# Altium PCB Gimbal.PcbDoc
Units mm, origin at the board's own origin, x right, y up, seen from the top; angles counter-clockwise.
Board outline 50 x 31.8 mm, 2 copper layers (Top Layer, Bottom Layer); 74 components, 94 nets, 328 pads, 49 vias.
Unrouted connection lines stored in the file: 148.
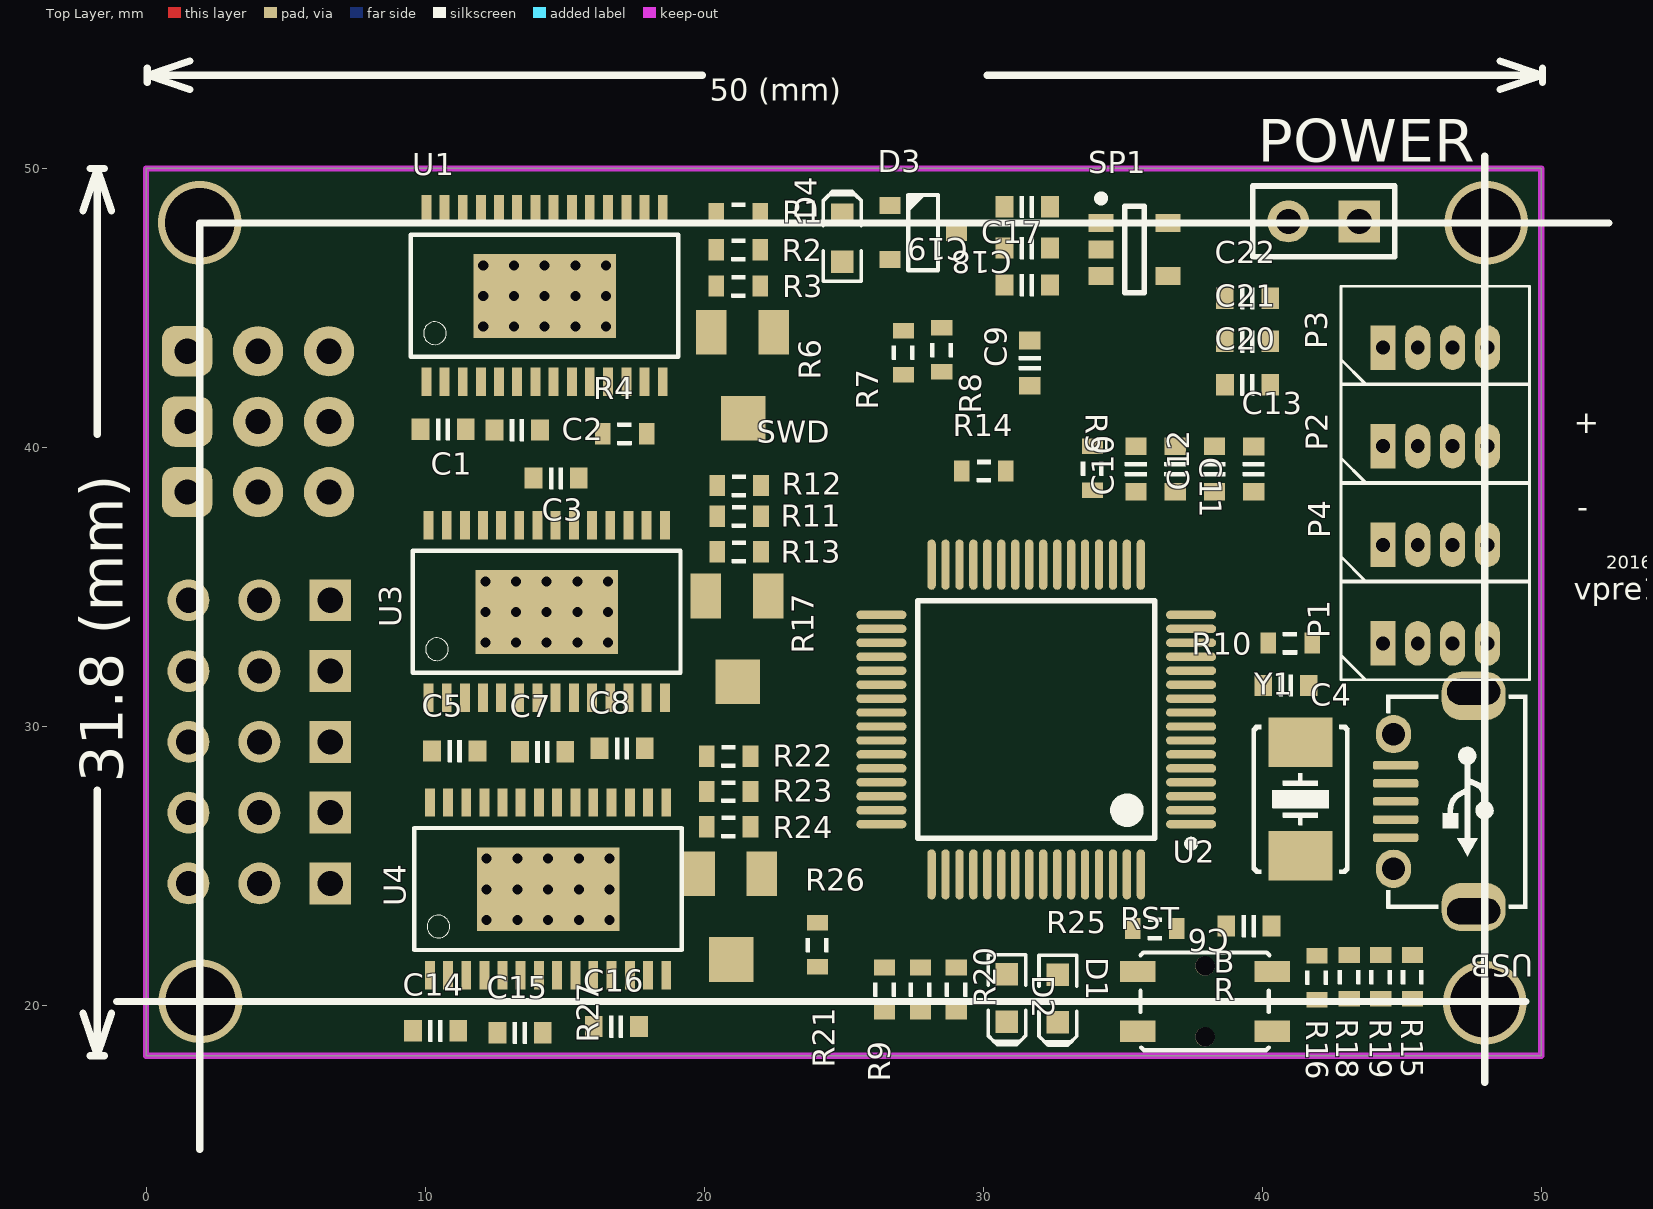
[diagram p0: Top Layer view]
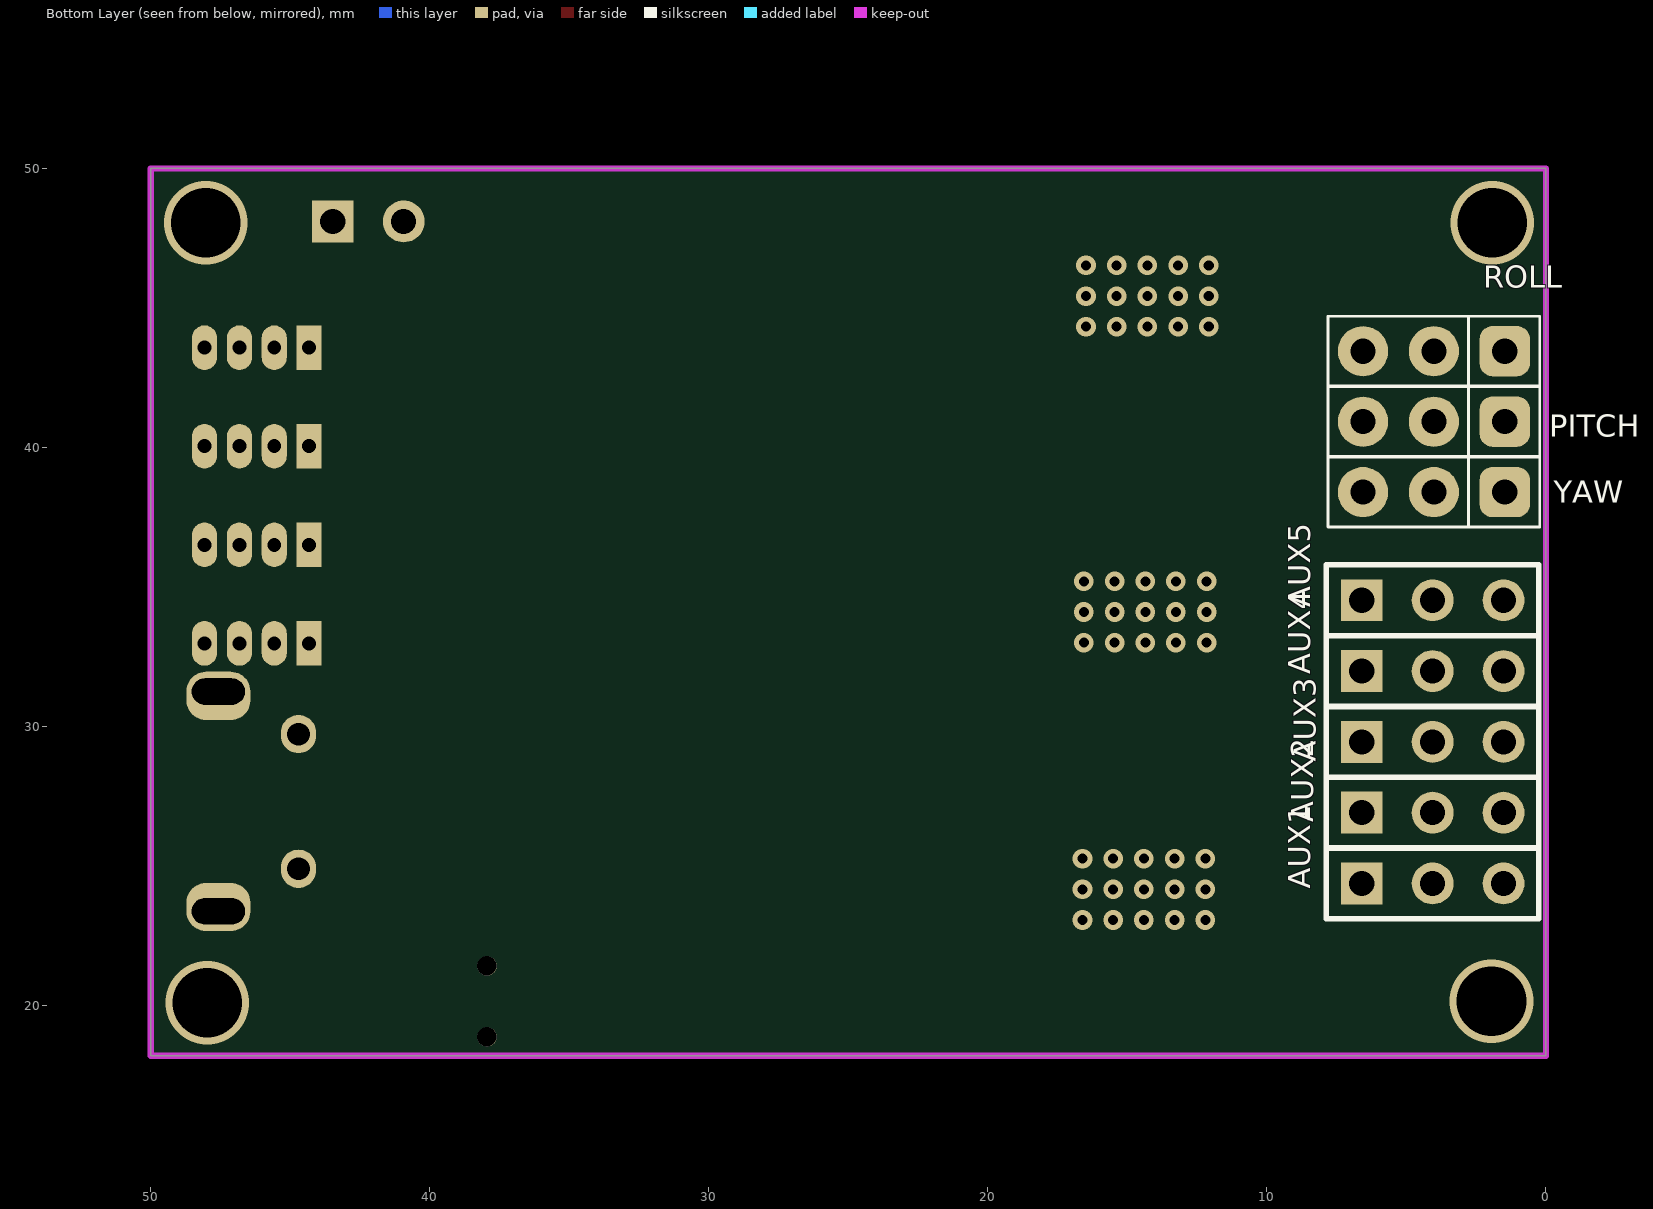
[diagram p1: Bottom Layer view, seen from below]

## Layer stack, top to bottom
Top Solder: solder mask 0.0102, Solder Resist, Dk 3.5
Top Layer: signal copper 0.0356
Dielectric1: dielectric 0.32, FR-4, Dk 4.8
Bottom Layer: signal copper 0.0356
Bottom Solder: solder mask 0.0102, Solder Resist, Dk 3.5

## Board outline
0,18.2 0,50 50,50 50,18.2

## Design rules (kind name [scope] priority, off if disabled: settings)
Clearance Clearance_1 [(OnLayer('Keep-Out Layer')) vs inPolygon] p1: gap=0.381
Clearance [All] p2: gap=0.152
ComponentClearance [All] p1 off: gap=0.254 collisioncheckmode=3 verticalgap=0.254 showdistances=FALSE
Height [All] p1 off: minheight=0 maxheight=25.4 prefheight=12.7
HoleSize [All] p1: absolutevalues=TRUE maxlimit=2.54 minlimit=0.33 maxpercent=80.000 minpercent=20.000
HoleToHoleClearance [All] p1: gap=0.254 allowstackedmicrovias=FALSE
MinimumAnnularRing [All] p1: minimumring=0.178
MinimumSolderMaskSliver [All] p1 off: minsoldermaskwidth=0.254
NetAntennae [All] p1 off: netantennaetolerance=0
PolygonConnect [IsPoly vs IsVia] p1: connectstyle=Direct reliefconductorwidth=0.254 reliefentries=4 polygonreliefangle="90 Angle" airgapwidth=0.254
PolygonConnect PolygonConnect_1 [All] p2: connectstyle=Relief reliefconductorwidth=0.3 reliefentries=4 polygonreliefangle="90 Angle" airgapwidth=0.254
RoutingVias [All] p1: holewidth=0.4 width=0.8 viastyle="Through Hole" minholewidth=0.4 minwidth=0.8 maxholewidth=0.4 maxwidth=0.8
SilkToSilkClearance [All] p1 off: silktosilkclearance=0.254
SilkToSolderMaskClearance SilkscreenOverComponentPads [IsPad] p1 off: minsilkscreentomaskgap=0.254 clearancetoexposedcopper=TRUE
SolderMaskExpansion [All] p1: expansion=0.05
Width [All] p1: maxlimit=2 minlimit=0.152 preferedwidth=0.22
22 further rules are at their usual default settings.

## Components (designator, comment, footprint, x,y, rotation, side; value= is the part's Value field where it differs from the comment)
AUX1 "" HDR1X3 6.6,24.375 r180 bottom
AUX2 "" HDR1X3 6.6,26.913 r180 bottom
AUX3 "" HDR1X3 6.6,29.45 r180 bottom
AUX4 "" HDR1X3 6.6,31.988 r180 bottom
AUX5 "" HDR1X3 6.6,34.525 r180 bottom
C1 "Cap" c-0603 10.65,40.65 r0 top
C2 "Cap" C-0603 13.3,40.625 r180 top
C3 "Cap" c-0603 14.7,38.9 r0 top
C4 "22pF" C-0603 40.85,31.475 r180 top
C5 "Cap" c-0603 11.064,29.119 r0 top
C6 "22pF" C-0603 39.525,22.85 r0 top
C7 "Cap" c-0603 14.214,29.094 r0 top
C8 "Cap" c-0603 17.064,29.219 r0 top
C9 "CAP" C-0603 31.675,43.025 r90 top
C10 "CAP" C-0603 35.475,39.225 r270 top
C11 "CAP" C-0603 36.883,39.225 r270 top
C12 "CAP" C-0603 38.292,39.225 r270 top
C13 "Cap" c-0603 39.7,39.225 r90 top
C14 "Cap" c-0603 10.375,19.1 r180 top
C15 "Cap" c-0603 13.4,19.025 r180 top
C16 "Cap" c-0603 16.85,19.25 r180 top
C17 "Cap" C-0603 31.575,48.625 r180 top
C18 "Cap" C-0603 31.575,45.825 r180 top
C19 "Cap" c-0603 31.575,47.15 r180 top
C20 "Cap" c-0603 39.475,42.25 r180 top
C21 "Cap" c-0603 39.475,43.8 r0 top
C22 "Cap" c-0603 39.475,45.35 r0 top
D1 "APT1608SGC" LED-0603-GREEN 32.675,20.25 r270 top
D2 "APT1608SGC" LED-0603-GREEN 30.85,20.275 r270 top
D3 "PMEG4005CT" SOT23-3 27.85,47.7 r0 top
D4 "APT1608QBC/D" LED-0603-BLUE 24.95,47.5 r90 top
P1 "I2C" H53047-04 44.323,32.979 r0 top
P2 "UART1" H53047-04 44.323,40.045 r0 top
P3 "UART4" H53047-04 44.323,43.578 r0 top
P4 "SWD" H53047-04 44.323,36.512 r0 top
PITCH "Header 3" IDC1-3M 1.475,40.925 r180 bottom
POWER "Header 2" HDR1X2 43.475,48.1 r180 top
R1 "RES" R-0603 21.225,48.375 r180 top
R2 "RES" R-0603 21.225,47.075 r180 top
R3 "RES" R-0603 21.225,45.775 r180 top
R4 "TBD" R-0603 17.15,40.5 r0 top
R5 "10k" R-0603 33.925,39.25 r270 top
R6 "Res_VR_3" RES_VR_3313J 21.375,42.55 r180 top
R7 "100" R-0603 27.15,43.4 r270 top
R8 "100" R-0603 28.525,43.5 r270 top
R9 "10k" R-0603 26.475,20.575 r270 top
R10 "10k" R-0603 41,33 r0 top
R11 "RES" R-0603 21.25,37.525 r180 top
R12 "RES" R-0603 21.25,38.625 r180 top
R13 "RES" R-0603 21.25,36.25 r180 top
R14 "TBD" R-0603 30.025,39.15 r180 top
R15 "1k5" R-0603 45.375,21.025 r90 top
R16 "22" R-0603 41.95,21 r90 top
R17 "Res_VR_3" RES_VR_3313J 21.175,33.1 r180 top
R18 "22" R-0603 43.125,21.025 r270 top
R19 "220" R-0603 44.259,21.025 r270 top
R20 "330" R-0603 29.025,20.575 r90 top
R21 "330" R-0603 27.759,20.575 r270 top
R22 "RES" R-0603 20.875,28.925 r180 top
R23 "RES" R-0603 20.875,27.662 r180 top
R24 "RES" R-0603 20.875,26.4 r180 top
R25 "Res" r-0603 36.15,22.75 r180 top
R26 "TBD" R-0603 24.05,22.175 r90 top
R27 "Res_VR_3" RES_VR_3313J 20.95,23.15 r180 top
ROLL "Header 3" IDC1-3M 1.475,43.45 r180 bottom
RST "BT_TACT_3.5*5_90" BUTTONTACT_3.5*3.55_90 37.95,20.15 r180 top
SP1 "SP6205" SOT23-5 35.425,47.1 r0 top
U1 "DRV8313" TSSOP-28P-C 14.275,45.438 r0 top
U2 "STM32F103RCT6" LQFP64_N 31.9,30.25 r180 top
U3 "DRV8313" TSSOP-28P-C 14.35,34.114 r0 top
U4 "DRV8313" TSSOP-28P-C 14.4,24.176 r0 top
USB "USB_Micro" USB_Micro-AB 47.32,27.315 r270 top
Y1 "XTAL" XT_5032_2 41.375,27.4 r270 top
YAW "Header 3" IDC1-3M 1.475,38.4 r180 bottom

## Footprints (in the part's own frame and the unit in brackets; to place one, negate y for a bottom-side part, rotate by r counter-clockwise, add the part's x,y. Pads: shape width x height; smd on the part's side, far side on the other; paste and mask are expansions set on the pad)
BUTTONTACT_3.5*3.55_90 [mil]
  round 27.56 hole 27.56 mask+0: 0(-0.01,-50) 0(0,50)
  rect 50x30 smd: 1(-95,42) 2(-95,-42) 3(95,42) 4(95,-42)
  silkscreen extent -91,-69 91,69, body extent -90,-55 91,85, height 56
c-0603 [mil]
  rect 25x30 smd: 1(-32.13,0.08) 2(31.87,0.08)
  silkscreen extent -9,-15 10,15, body extent -31,-16 32,16, height 31
C-0603 [mil]
  rect 25x30 smd: 1(-32.13,0.08) 2(31.87,0.08)
  silkscreen extent -9,-15 10,15, body extent -31,-16 32,16, height 31
H53047-04 [mm]
  rect 0.9x1.6 hole 0.5: 1(0,0)
  oval 0.9x1.6 hole 0.5: 2(1.25,0) 3(2.5,0) 4(3.75,0)
  silkscreen extent -1.5,-1.3 5.25,2.2, body extent -1.5,-1.3 5.25,2.2, height 4.17
HDR1X2 [mm] "Connector; Header; 2 Position"
  rect 1.5x1.5 hole 0.9: 1(0,0)
  round 1.5 hole 0.9: 2(2.54,0)
  silkscreen extent -1.27,-1.27 3.81,1.27
HDR1X3 [mm] "Connector; Header; 3 Position"
  rect 1.5x1.5 hole 0.9: 1(0,0)
  round 1.5 hole 0.9: 2(2.54,0) 3(5.08,0)
  silkscreen extent -1.27,-1.27 6.35,1.27
IDC1-3M [mm]
  rrect50% 1.8x1.8 hole 0.9: 1(0,0)
  round 1.8 hole 0.9: 2(-2.54,0) 3(-5.08,0)
  silkscreen extent -6.33,-1.25 1.25,1.25
LED-0603-BLUE [mm]
  round 0.254 on Mech14: 0(0,0)
  rect 0.8x0.8 smd: A(-0.85,0) K(0.85,0)
  Top Layer pour cut-out: -0.5,0.5 0.5,0.5 0.5,-0.5 -0.5,-0.5
  silkscreen extent -1.55,-0.67 1.68,0.67, body extent -0.8,-0.4 0.8,0.4, height 0.75
LED-0603-GREEN [mm]
  round 0.254 on Mech14: 0(0,0)
  rect 0.8x0.8 smd: A(-0.85,0) K(0.85,0)
  Top Layer pour cut-out: -0.5,0.5 0.5,0.5 0.5,-0.5 -0.5,-0.5
  silkscreen extent -1.55,-0.67 1.68,0.67, body extent -0.8,-0.4 0.8,0.4, height 0.75
LQFP64_N [mm] "Thin QFP, 64-Leads, Body 10x10mm, Pitch 0.5mm, IPC Medium Density"
  oval 1.8x0.3 smd: 1(-5.55,3.75) 2(-5.55,3.25) 3(-5.55,2.75) 4(-5.55,2.25) 5(-5.55,1.75) 6(-5.55,1.25) 7(-5.55,0.75) 8(-5.55,0.25) 9(-5.55,-0.25) 10(-5.55,-0.75) 11(-5.55,-1.25) 12(-5.55,-1.75) 13(-5.55,-2.25) 14(-5.55,-2.75) 15(-5.55,-3.25) 16(-5.55,-3.75) 33(5.55,-3.75) 34(5.55,-3.25) 35(5.55,-2.75) 36(5.55,-2.25) 37(5.55,-1.75) 38(5.55,-1.25) 39(5.55,-0.75) 40(5.55,-0.25) 41(5.55,0.25) 42(5.55,0.75) 43(5.55,1.25) 44(5.55,1.75) 45(5.55,2.25) 46(5.55,2.75) 47(5.55,3.25) 48(5.55,3.75)
  oval 0.3x1.8 smd: 17(-3.75,-5.55) 18(-3.25,-5.55) 19(-2.75,-5.55) 20(-2.25,-5.55) 21(-1.75,-5.55) 22(-1.25,-5.55) 23(-0.75,-5.55) 24(-0.25,-5.55) 25(0.25,-5.55) 26(0.75,-5.55) 27(1.25,-5.55) 28(1.75,-5.55) 29(2.25,-5.55) 30(2.75,-5.55) 31(3.25,-5.55) 32(3.75,-5.55) 49(3.75,5.55) 50(3.25,5.55) 51(2.75,5.55) 52(2.25,5.55) 53(1.75,5.55) 54(1.25,5.55) 55(0.75,5.55) 56(0.25,5.55) 57(-0.25,5.55) 58(-0.75,5.55) 59(-1.25,5.55) 60(-1.75,5.55) 61(-2.25,5.55) 62(-2.75,5.55) 63(-3.25,5.55) 64(-3.75,5.55)
  silkscreen extent -5.68,-4.25 4.25,4.57, body extent -6,-6 6,6, height 1.5
R-0603 [mil]
  rect 22x30 smd: 1(-30.99,-0.35) 2(31.01,-0.35)
  silkscreen extent -9,-16 10,15, body extent -31,-16 32,15, height 18
r-0603 [mil]
  rect 22x30 smd: 1(-30.99,-0.35) 2(31.01,-0.35)
  silkscreen extent -9,-16 10,15, body extent -31,-16 32,15, height 18
RES_VR_3313J [mm] "CA6SMD"
  rect 1.1x1.6 smd: 1(-1.118,-1.575) 2(1.118,-1.575)
  rect 1.6x1.6 smd: 3(-0.025,1.499)
  body extent -1.6,-1.79 1.6,1.71, height 2.45
SOT23-3 [mil]
  rect 30x24 smd: 1(-47,38) 2(-47,-38) 3(47,0)
  silkscreen extent -21,-53 21,53, body extent -55,-57 55,57, height 51
SOT23-5 [mm]
  rect 0.9x0.65 smd: 1(-1.2,0.95) 2(-1.2,0) 3(-1.2,-0.95) 4(1.2,-0.95) 5(1.2,0.95)
  silkscreen extent -1.32,-1.55 0.35,1.95, body extent -1.4,-1.45 1.4,1.45, height 1.45
TSSOP-28P-C [mil]
  rect 14x40 smd: 1(-166.34,-121.56) 2(-140.75,-121.56) 3(-115.16,-121.56) 4(-89.57,-121.56) 5(-63.98,-121.56) 6(-38.39,-121.56) 7(-12.8,-121.56) 8(13,-121.56) 9(39,-121.56) 10(64,-121.56) 11(90,-121.56) 12(116,-121.56) 13(141,-121.56) 14(167,-121.56) 15(167,122) 16(141,122) 17(116,122) 18(90,122) 19(64,122) 20(39,122) 21(13,122) 22(-12.8,122) 23(-38.39,122) 24(-63.98,122) 25(-89.57,122) 26(-115.16,122) 27(-140.75,122) 28(-166.34,122)
  rect 200.79x118.11 smd mask-236.22: 29(0.31,-0.39)
  silkscreen extent -189,-86 189,86, body extent -192,-129 194,131, height 41
USB_Micro-AB [mil]
  rrect80% 68x90 hole 37 slot 75 at 90 deg copper offset 6,0 mask+0: 0(-155,10)
  oval 54x50 hole 32 mask+0: 0(-95,-103) 0(95,-103)
  rrect80% 68x90 hole 37 slot 75 at 90 deg copper offset -6,0 mask+0: 0(155,10)
  rrect50% 12x64 smd: 1(51.18,-100) 2(25.59,-100) 3(0,-100) 4(-25.59,-100) 5(-51.18,-100)
  silkscreen extent -151,-113 151,86, body extent -161,-109 161,104, height 108
XT_5032_2 [mil]
  rect 70x90 smd: 1(-80,0) 2(80,0)
  silkscreen extent -105,-69 105,69, body extent -98,-63 98,63, height 39

## Part data
AUX1 AUX2 AUX3 AUX4 AUX5: library part "Header 3", "Header, 3-Pin"
C1 C2 C3 C4 C5 C6 C7 C8 C9 C10 C11 C12 C13 C14 C15 C16 C17 C18 C19 C20 C21 C22: library part CAP0805, "Capacitor"
D1 D2 D4: library part LED
D3: "Dual Diode Command Cathode 500ma"
P1 P2 P3 P4: library part "Header 4", "0530470410"
PITCH ROLL YAW: "Header, 3-Pin"
POWER: "Header, 2-Pin"
R1 R2 R3 R4 R5 R7 R8 R9 R10 R11 R12 R13 R14 R15 R16 R18 R20 R21 R22 R23 R24 R26: library part "RES 0603 330R", "Resistor"
R6 R17 R25 R27: "Resistor"
R19: library part Res, "Resistor"
RST: "Switch"
SP1: "Power"
U2: library part STM32F103RBT6, "STM32 ARM-based 32-bit MCU with 128 Kbytes Flash, 64-pin LQFP, Industrial Temperature"
USB: "USB"

## Via types
v1: diameter 0.7, hole 0.36, Top Layer to Bottom Layer, 45 vias
v2: diameter 3, hole 2.5, Top Layer to Bottom Layer, 4 vias

## Nets (pads, with @x,y where several pads share a name; then routed paths per layer and width w, separated by ;. In a path a pad name is that pad's centre, name@x,y a point inside that pad or via, vN(x,y) a via of type N, cw(c..) or ccw(c..) an arc to the next point about the centre after c; other vN are vias at no path point)
+3.3V: P2.4
AUX1: AUX1.1 U2.11 U2.53
AUX2: AUX2.1 U2.10 U2.54
AUX3: AUX3.1 U2.55
AUX4: AUX4.1 U2.56
AUX5: AUX5.1 U2.57
BOOT0: R9.1 U2.60
BOOT1: R5.2 U2.28
DM: R16.1 U2.44
DP: R15.2 R18.1 U2.45
GND: AUX1.3 AUX2.3 AUX3.3 AUX4.3 AUX5.3 C3.2 C4.2 C6.2 C8.2 C9.2 C10.2 C11.2 C12.2 C13.2 C16.2 C17.2 C18.2 C19.2 C20.2 C21.2 C22.2 D1.K D2.K D4.K P1.3 P2.1 P3.1 P4.1 POWER.2 R1.2 R2.2 R3.2 R4.2 R5.1 R6.1 R9.2 R11.2 R12.2 R13.2 R14.2 R17.1 R22.2 R23.2 R24.2 R26.2 R27.1 RST.2 RST.4 SP1.2 U1.14 U2.12 U2.18 U2.31 U2.47 U2.63 U3.14 U4.14 USB.5
  other v2: 1.95,20.15
LED1: R21.1 U2.33
LED2: R20.1 U2.17
NetC1_1: C1.1 U1.1
NetC1_2: C1.2 U1.2
NetC2_1: C2.1 U1.3
NetC4_1: C4.1 U2.5 Y1.2
NetC5_1: C5.1 U3.1
NetC5_2: C5.2 U3.2
NetC6_1: C6.1 U2.6 Y1.1
NetC7_1: C7.1 U3.3
NetC14_1: C14.1 U4.1
NetC14_2: C14.2 U4.2
NetC15_1: C15.1 U4.3
NetC17_1: C17.1 D3.3 SP1.1 SP1.3
NetC19_1: C19.1 SP1.4
NetD1_A: D1.A R20.2
NetD2_A: D2.A R21.2
NetD4_A: D4.A R25.1
NetP2_2: P2.2 R8.2
NetP2_3: P2.3 R7.2
NetR4_1: R4.1 U1.6 U1.7 U1.10 U1.12
NetR6_2: R6.2 U1.15
NetR6_3: R6.3 U1.13
NetR14_1: R14.1 U3.6 U3.7 U3.10 U3.12
NetR16_2: R16.2 USB.2
NetR17_2: R17.2 U3.15
NetR17_3: R17.3 U3.13
NetR18_2: R18.2 R19.2 USB.3
NetR26_1: R26.1 U4.6 U4.7 U4.10 U4.12
NetR27_2: R27.2 U4.15
NetR27_3: R27.3 U4.13
NetU1_20: U1.20 U1.28 U1.29
  other v1: 12.083,44.328 13.183,44.328 14.283,44.328 15.383,44.328 16.483,44.328 12.083,45.428 13.183,45.428 14.283,45.428 15.383,45.428 16.483,45.428 12.083,46.528 13.183,46.528 14.283,46.528 15.383,46.528 16.483,46.528
NetU3_20: U3.20 U3.28 U3.29
  other v1: 12.158,33.004 13.258,33.004 14.358,33.004 15.458,33.004 16.558,33.004 12.158,34.104 13.258,34.104 14.358,34.104 15.458,34.104 16.558,34.104 12.158,35.204 13.258,35.204 14.358,35.204 15.458,35.204 16.558,35.204
NetU4_20: U4.20 U4.28 U4.29
  other v1: 12.208,23.066 13.308,23.066 14.408,23.066 15.508,23.066 16.608,23.066 12.208,24.166 13.308,24.166 14.408,24.166 15.508,24.166 16.608,24.166 12.208,25.266 13.308,25.266 14.408,25.266 15.508,25.266 16.608,25.266
NRST: C9.1 P4.4 R10.1 RST.1 RST.3 U2.7
PA4: U2.20
PA5: U2.21
PA6: U2.22
PB9: U2.62
PC0: U2.8
PC1: U2.9
PC4: U2.24
PC5: U2.25
PITCH_EN1: R3.1 U1.26 U2.23
PITCH_EN2: R2.1 U1.24 U2.26
PITCH_EN3: R1.1 U1.22 U2.27
PITCH_IN1: U1.27 U2.37
PITCH_IN2: U1.25 U2.38
PITCH_IN3: U1.23 U2.39
PITCH_OUT1: PITCH.1 U1.5
PITCH_OUT2: PITCH.2 U1.8
PITCH_OUT3: PITCH.3 U1.9
ROLL_EN1: R13.1 U2.34 U3.26
ROLL_EN2: R12.1 U2.35 U3.24
ROLL_EN3: R11.1 U2.36 U3.22
ROLL_IN1: U2.41 U3.27
ROLL_IN2: R8.1 U2.42 U3.25
ROLL_IN3: R7.1 U2.43 U3.23
ROLL_OUT1: ROLL.1 U3.5
ROLL_OUT2: ROLL.2 U3.8
ROLL_OUT3: ROLL.3 U3.9
RX: P3.3 U2.52
SCL: P1.1 U2.29
SDA: P1.2 U2.30
SWCLK: P4.3 U2.49
SWDIO: P4.2 U2.46
TX: P3.2 U2.51
USB_DISC: R19.1 U2.50
USBVCC5: D3.2
VCC3.3: AUX1.2 AUX2.2 AUX3.2 AUX4.2 AUX5.2 C10.1 C11.1 C12.1 C13.1 C18.1 P1.4 P3.4 R10.2 R15.1 R25.2 SP1.5 U2.1 U2.13 U2.19 U2.32 U2.48 U2.64
VCC5: USB.1
VCC12: C2.2 C3.1 C7.2 C8.1 C15.2 C16.1 C20.1 C21.1 C22.1 U1.4 U1.11 U3.4 U3.11 U4.4 U4.11
VCC112: POWER.1
VIN5: D3.1
YAW_EN1: R24.1 U2.58 U4.26
YAW_EN2: R23.1 U2.59 U4.24
YAW_EN3: R22.1 U2.61 U4.22
YAW_IN1: U2.14 U4.27
YAW_IN2: U2.15 U4.25
YAW_IN3: U2.16 U4.23
YAW_OUT1: U4.5 YAW.1
YAW_OUT2: U4.8 YAW.2
YAW_OUT3: U4.9 YAW.3
pads on no net: D1.0 D2.0 D4.0 RST.0 U1.16 U1.17 U1.18 U1.19 U1.21 U2.2 U2.3 U2.4 U2.40 U3.16 U3.17 U3.18 U3.19 U3.21 U4.16 U4.17 U4.18 U4.19 U4.21 USB.0 USB.4
copper on no net:
  other v2: 47.975,20.1 1.925,48.05 48.025,48.05

## Keep-outs
Keep-Out Layer:
  the board outline again, w0.22

## Silkscreen, mask and mechanical layers (free items; w line width, h text height)
Top Overlay:
  lines w0.254: -2.258,19.724 -1.75,18.2 ; -2.258,48.476 -1.75,50 ; -2.004,18.2 -1.496,18.2 ; -2.004,50 -1.496,50 ; -1.75,27.727 -1.75,18.2 ; -1.75,40.473 -1.75,50 ; -1.242,19.724 -1.75,18.2 ; -1.242,48.476 -1.75,50 ; -1.05,20.15 49.45,20.15 ; 0.043,53.086 0.043,53.594 ; 1.567,52.832 0.043,53.34 ; 1.567,53.848 0.043,53.34 ; 1.925,14.85 1.925,48.05 52.425,48.05 ; 19.939,53.34 0.043,53.34 ; 30.147,53.34 50.043,53.34 ; 47.975,17.25 47.975,50.45 ; 48.519,52.832 50.043,53.34 ; 48.519,53.848 50.043,53.34 ; 50.043,53.086 50.043,53.594
  text "50 (mm)" at 20.193,52.426 h0.8
  text "+" at 51.162,40.512 h0.8
  text "SWD" at 21.887,40.162 h0.8
  text "-" at 51.287,37.487 h0.8
  text "20161105" at 52.324,35.484 h0.8
  text "vpre1.3-ce2" at 51.156,34.544 h0.8
  text "31.8 (mm)" at -0.836,27.981 h1.52 r90
  text "B" at 38.267,21.184 h0.8
  text "R" at 38.267,20.193 h0.8